# EAGLE board schematic (EAGLE 8.6.3)
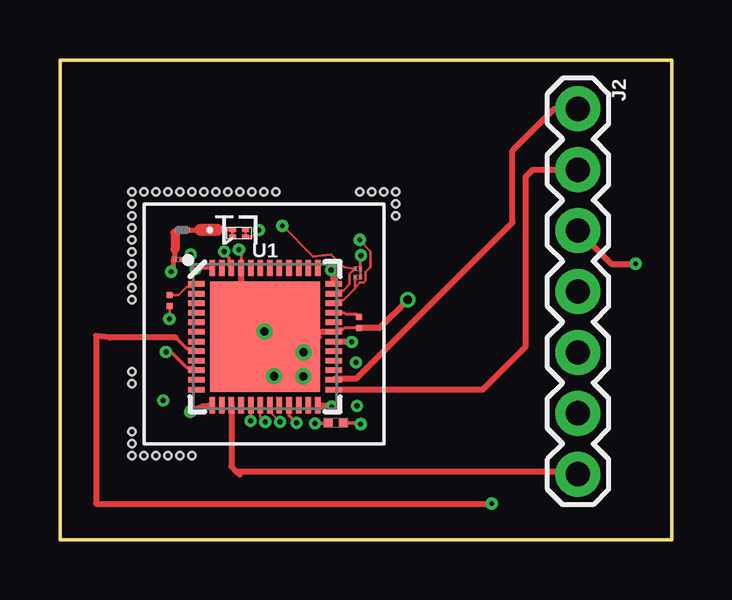
[diagram p0: board, top side]
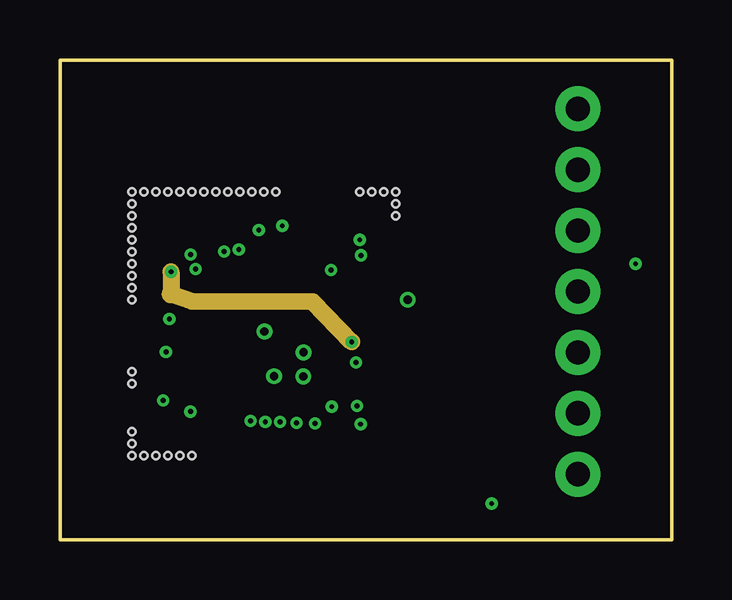
[diagram p1: board, inner layer Route4]
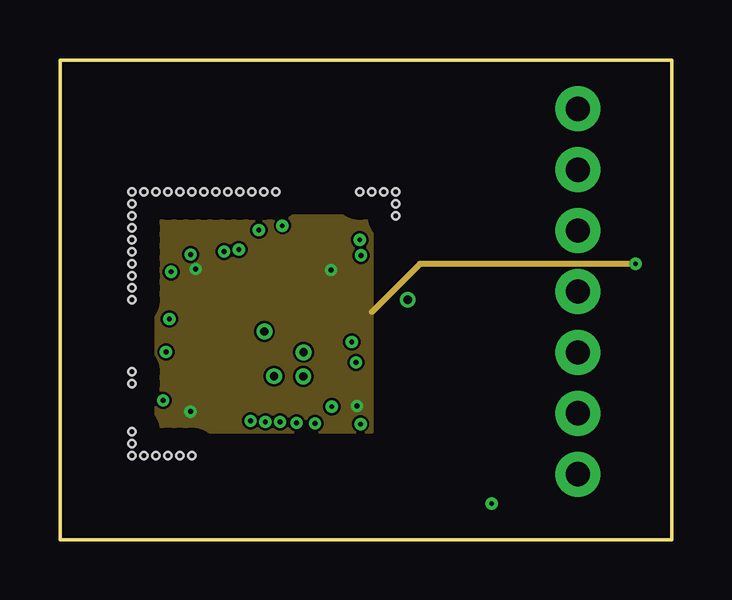
[diagram p2: board, inner layer Route8]
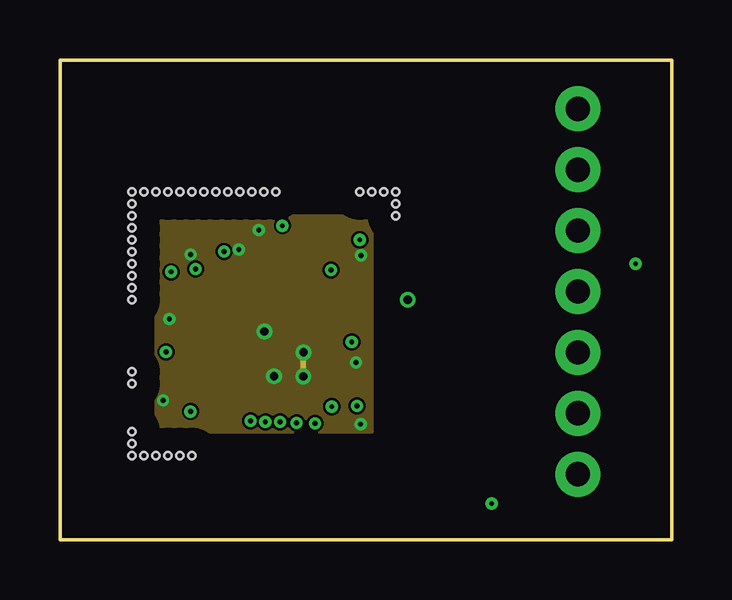
[diagram p3: board, inner layer Route10]
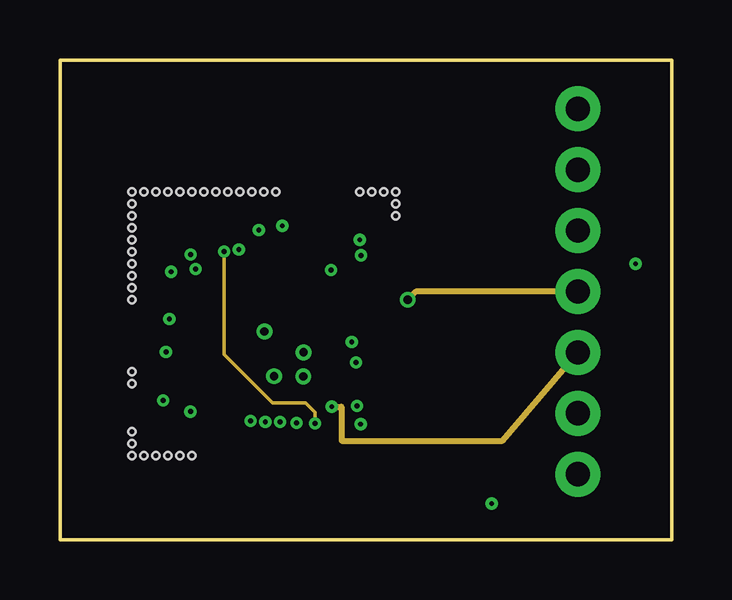
[diagram p4: board, inner layer Route12]
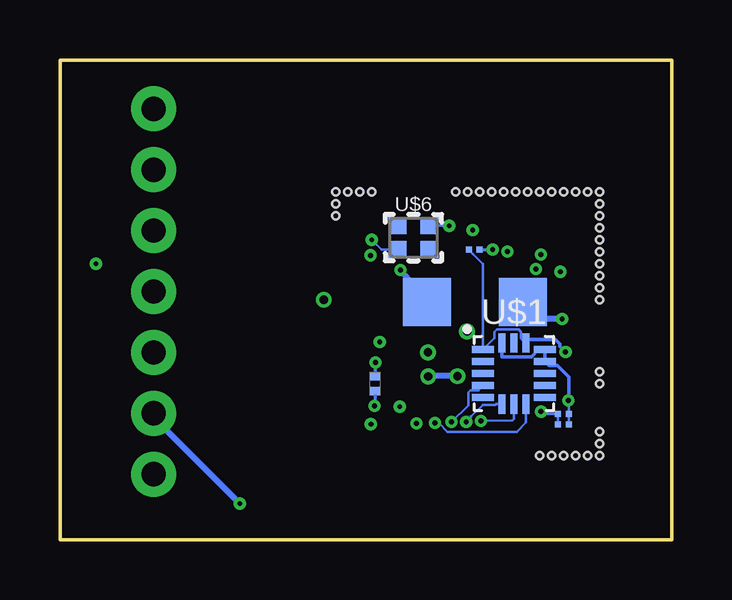
[diagram p5: board, bottom side, seen from below]

Size 25.5 x 20 mm. Coordinates in mm from the lower left corner, seen from the top.
Outline: 0,0 0,20 25.5,20 25.5,0 0,0
Copper layers (((1*4)*8*10)*(12*16)): Top 0.035mm / dielectric 0.25mm / Route4 0.035mm / dielectric 0.31mm / Route8 0.035mm / dielectric 0.25mm / Route10 0.035mm / dielectric 0.31mm / Route12 0.035mm / dielectric 0.25mm / Bottom 0.035mm
Design rules "default *": minimum track width 4mil, minimum drill 8mil, track to track 4mil, track to pad 4mil, pad to pad 4mil, via to via 4mil, smd to smd 2mil, copper to edge 40mil, drill to drill 6mil, minimum pad ring 10mil, minimum via ring 6mil, stop-mask expansion 4mil, vias tented up to drill 0mil, thermal gap 10mil
Holes 0.3 mm at 3,14 3,13.5 3,13 3,12.5 3,12 3,11.5 3,11 3,10.5 3,10 3,7 3,6.5 3,4.5 3,4 3,3.5 3.5,3.5 4,3.5 4.5,3.5 5,3.5 5.5,3.5 3,14.5 3.5,14.5 4,14.5 4.5,14.5 5,14.5 5.5,14.5 6,14.5 6.5,14.5 7,14.5 7.5,14.5 8,14.5 8.5,14.5 9,14.5 12.5,14.5 13,14.5 13.5,14.5 14,14.5 14,14 14,13.5

## Footprints (pad centres in the part's own frame; a part is rotated, then mirrored left to right if it is on the bottom)
CAP_0402-L = smd 0.25 x 0.25: 1 -0.229,0; 2 0.229,0
1X07 = drill 1.016 pad 1.88: 1 0,0; 2 2.54,0; 3 5.08,0; 4 7.62,0; 5 10.16,0; 6 12.7,0; 7 15.24,0
IND_0402-L = smd 0.212 x 0.2: 1 -0.196,0; 2 0.196,0
QFN48-6X6MM = smd 0.68 x 0.23: 1 -2.86,2.2; 2 -2.86,1.8; 3 -2.86,1.4; 4 -2.86,1; 5 -2.86,0.6; 6 -2.86,0.2; 7 -2.86,-0.2; 8 -2.86,-0.6; 9 -2.86,-1; 10 -2.86,-1.4; 11 -2.86,-1.8; 12 -2.86,-2.2; 25 2.86,-2.2; 26 2.86,-1.8; 27 2.86,-1.4; 28 2.86,-1; 29 2.86,-0.6; 30 2.86,-0.2; 31 2.86,0.2; 32 2.86,0.6; 33 2.86,1; 34 2.86,1.4; 35 2.86,1.8; 36 2.86,2.2 | smd 0.23 x 0.68: 13 -2.2,-2.86; 14 -1.8,-2.86; 15 -1.4,-2.86; 16 -1,-2.86; 17 -0.6,-2.86; 18 -0.2,-2.86; 19 0.2,-2.86; 20 0.6,-2.86; 21 1,-2.86; 22 1.4,-2.86; 23 1.8,-2.86; 24 2.2,-2.86; 37 2.2,2.86; 38 1.8,2.86; 39 1.4,2.86; 40 1,2.86; 41 0.6,2.86; 42 0.2,2.86; 43 -0.2,2.86; 44 -0.6,2.86; 45 -1,2.86; 46 -1.4,2.86; 47 -1.8,2.86; 48 -2.2,2.86 | smd 4.6 x 4.6: EP 0,0
TFLGA-16/3.3MMX3.1MM = smd 0.3 x 0.8: CS 0.5,-1.275; GND@3 -0.5,1.275; MISO 0,-1.275; MOSI -0.5,-1.275; NC@2 0,1.275; VS 0.5,1.275 | smd 0.925 x 0.3: GND@1 1.288,0.5; GND@2 1.288,1; INT1 1.288,0; INT2 1.288,-1; NC@1 -1.288,0.5; RESERVED@1 -1.288,0; RESERVED@2 -1.288,-1; RESERVED@3 1.288,-0.5; SCLK -1.288,-0.5; VDD/IO -1.288,1
4P7UFCAPACITOR = smd 0.35 x 0.4: P$3 0.18,0.15; P$4 0.8,0.15
0P8PFCAPACITOR = smd 0.125 x 0.15: P$1 0.034,0.075; P$2 0.27,0.075
ANTENNA_FOOTPRINT = smd 0.3 x 0.2: FEED@1 0.77,0.1; FEED@2 0.77,0.4; GND@1 0.23,0.1; GND@2 0.23,0.4
32MHZCRYSTAL = smd 0.75 x 0.7: 1 0.485,0.47; 2 1.835,0.47; 3 1.835,1.47; 4 0.485,1.47
1UFCAPACITOR = smd 0.35 x 0.4: P$3 0.18,0.15; P$4 0.8,0.15
6PFCAPACITOR = smd 0.125 x 0.15: P$1 0.034,0.075; P$2 0.27,0.075
POWER = smd 2 x 2: GND 5,1; VDD 1,1

## Placement (x,y rotation side)
C1  C0402X5R0G104M020BCCAP_0402-L  [CAP_0402-L]  8.23,12.1 180 bottom
C2  C0402X5R0G104M020BCCAP_0402-L  [CAP_0402-L]  4.57,9.97 270 top
C3  C0402X5R0G104M020BCCAP_0402-L  [CAP_0402-L]  4.52,4.8 180 bottom
C4  C0402X5R0G104M020BCCAP_0402-L  [CAP_0402-L]  4.51,5.24 180 bottom
C5  C0402C0G1C101J020BCCAP_0402-L  [CAP_0402-L]  12.48,9.05 270 top
J2  header  [1X07]  21.6,17.96 270 top
L1  MLG0402Q3N9ST000IND_0402-L  [IND_0402-L]  5.11,12.91 180 top
U1  NRF52832  [QFN48-6X6MM]  8.55,8.46 0 top
U$1  ADXL362  [TFLGA-16/3.3MMX3.1MM]  6.57,6.92 0 bottom
U$2  4P7UFCAPACITOR  [4P7UFCAPACITOR]  12.21,6.01 90 bottom
U$4  0P8PFCAPACITOR  [0P8PFCAPACITOR]  5.09,11.75 180 top
U$5  ANTENNA  [ANTENNA_FOOTPRINT]  7.96,13.03 180 top
U$6  32MHZCRYSTAL  [32MHZCRYSTAL]  11.92,11.62 0 bottom
U$7  1UFCAPACITOR  [1UFCAPACITOR]  12,5.02 180 top
U$8  6PFCAPACITOR  [6PFCAPACITOR]  12.56,11.02 180 top
U$9  6PFCAPACITOR  [6PFCAPACITOR]  12.57,11.37 180 top
U$10  POWER  [POWER]  11.2,8.91 0 bottom

## Library data of the parts
C1-C4 = 0p1_uF_capacitor; MANUFACTURER_PART_NUMBER: C0402C0G1C101J020BC; VENDOR: TDK
C5 = 100_pF_capacitor; MANUFACTURER_PART_NUMBER: C0402C0G1C101J020BC; VENDOR: TDK
J2 = SparkFun-Connectors
L1 = 3p9_nH_inductor; MANUFACTURER_PART_NUMBER: MLG0402Q3N9ST000; VENDOR: TDK
U1 = nrf52832-breakout-temp; PROD_ID: IC-13460
U$1 = ADXL362
U$2 = 4p7_uF_capacitor
U$4 = 0p8_pF_capacitor
U$5 = 2p4_ghz_antenna
U$6 = 32_mhz_crystal
U$7 = 1_uF_capacitor
U$8 U$9 = 6_pF_capacitor
U$10 = power

## Nets
ADXL_POWER-QFAA: C1.2 U1.10 U$1.VDD/IO U$1.VS
ANT-QFAA: L1.2 U1.30 U$4.P$2
CS-QFAA: U1.21 U$1.CS
DEC1-QFAA: C2.1 U1.1
DEC3-QFAA: C5.1 U1.33
DEC4-QFAA: U1.46 U$7.P$4
GND: C1.1 C2.2 C3.1 C4.1 C5.2 J2.4 U1.31 U1.45 U1.EP U$1.GND@1 U$1.GND@2 U$1.GND@3 U$2.P$4 U$4.P$1 U$5.GND@1 U$5.GND@2 U$7.P$3 U$8.P$1 U$9.P$1 U$10.GND
MISO-QFAA: U1.17 U$1.MISO
MOSI-QFAA: U1.18 U$1.MOSI
N$1: L1.1 U$5.FEED@1 U$5.FEED@2
P0.06-QFAA: J2.6 U1.8
P0.12-QFAA: J2.7 U1.15
RESET-QFAA: J2.5 U1.24
SCLK-QFAA: U1.19 U$1.SCLK
SWDCLK-QFAA: J2.2 U1.25
SWDIO-QFAA: J2.1 U1.26
VDD: C3.2 C4.2 J2.3 U1.13 U1.36 U1.48 U$2.P$3 U$10.VDD
XC1-QFAA: U1.34 U$6.1 U$8.P$2
XC2-QFAA: U1.35 U$6.3 U$9.P$2

## Tracks (layer width: path | path; a pad name or v marks a point on that pad's centre or on a via)
ADXL_POWER-QFAA  (via drill 0.2)
  Top 0.152: U1.10 5.58,7.17 5.28,7.17 4.63,7.82 v4.42,7.82
  Bottom 0.102: U$1.VS 6.22,8.34 6.27,8.4 6.27,8.66 6.36,8.75 7.29,8.75 7.38,8.66 7.38,8.41 U$1.VDD/IO 7.86,11.49 8.28,11.91 8.28,11.92 C1.2
  Bottom 0.152: v4.42,7.82 4.65,8.04 4.65,8.15 4.84,8.34 6.22,8.34
ANT-QFAA  (via drill 0.2)
  Top 0.127: U$4.P$2 4.72,11.64
  Top 0.203: 4.8,12.3 4.8,12.1 4.8,11.84 4.79,11.84 4.72,11.64 4.72,11.26 v4.63,11.16
  Top 0.254: v12.17,8.24 11.43,8.24 11.42,8.25 | 11.42,8.25 11.41,8.25 | U1.30 11.42,8.25 | L1.2 4.8,12.79
  Top 0.381: 4.8,12.79 4.8,12.1
  Route4 0.711: v12.17,8.24 10.54,9.92 5.49,9.95 4.6,10.27 4.6,10.2 4.63,10.23 v4.63,11.16
CS-QFAA  (via drill 0.2)
  Top 0.152: U1.21 9.55,5.17 v9.87,4.86
  Bottom 0.102: v9.87,4.86 9.71,4.86 9.34,4.5 6.46,4.5 6.07,4.88 6.07,4.89 U$1.CS
DEC1-QFAA
  Top 0.102: U1.1 5.56,10.53 5.29,10.53 4.96,10.2 C2.1
DEC3-QFAA
  Top 0.127: U1.33 11.86,9.46 11.91,9.41 12.35,9.41 C5.1
DEC4-QFAA  (via drill 0.2)
  Top 0.152: U1.46 7.04,11.43 7.04,11.73 6.85,11.93 v6.85,12.02 | v10.63,4.84 11.17,4.84 U$7.P$4
  Route12 0.152: v6.85,12.02 6.85,7.72 8.87,5.7 10.24,5.7 10.63,5.31 v10.63,4.84
GND  (via drill 0.2, 0.35)
  Top 0.102: U$4.P$1 5.25,11.68 v5.45,11.89 | U$5.GND@1 U$5.GND@2 8.02,12.63 v8.29,12.9 | U$9.P$1 U$8.P$1 | C2.2 v4.57,9.2 v4.56,9.19
  Top 0.127: v7.46,12.1 7.55,12 U1.45 | U$9.P$1 12.53,11.84 v12.55,11.85 | C5.2 11.86,8.82 11.82,8.78 11.53,8.78 U1.31
  Top 0.152: 10.45,8.46 U1.EP | U$7.P$3 12.48,4.87 v12.54,4.81
  Top 0.203: U1.45 7.55,10.9 | v8.53,8.68 U1.EP
  Top 0.254: v14.5,10 13.32,8.82 C5.2 | U1.31 10.78,8.66 | 10.78,8.66 10.65,8.66 10.45,8.46 | 7.55,10.9 7.55,9.46 v8.53,8.68 | U1.EP 8.93,8.08 v8.93,6.82 | v10.15,7.81 10.78,8.43 10.78,8.66
  Route10 0.102: v5.45,11.89 5.45,11.85
  Route10 0.254: 10.13,6.73 10.13,6.78 v10.15,6.8 v10.15,7.8 v10.15,7.81
  Route12 0.254: J2.4 14.84,10.34 v14.5,10
  Bottom 0.102: C3.1 C4.1 4.28,5.78 v4.3,5.8
  Bottom 0.127: C1.1 v7.46,12.1 | U$2.P$4 12.35,6.83 v12.35,7.39
  Bottom 0.152: 4.59,9.22 v4.56,9.19 | 4.28,5.78 4.28,6.79 4.75,7.25 5.11,7.25 U$1.GND@1 U$1.GND@2 5.55,7.92 5.85,7.62 6.8,7.62 7.08,7.62 7.07,7.63 U$1.GND@3
  Bottom 0.254: U$10.GND 5.51,9.22 4.59,9.22 | v8.93,6.82 10.14,6.82 v10.15,6.8
  pour Route10: 4,4.5 13,4.5 13,13.5 4,13.5
MISO-QFAA  (via drill 0.2 pad 0.51)
  Top 0.102: U1.17 7.95,4.96 v7.95,4.95
  Bottom 0.102: v7.95,4.95 6.64,4.96 6.57,5.02 U$1.MISO
MOSI-QFAA  (via drill 0.2 pad 0.51)
  Top 0.102: U1.18 8.35,5.14 8.36,5.13 8.36,5.11 v8.56,4.9
  Bottom 0.102: v8.56,4.9 8.36,5.11 8.36,5.13 7.87,5.62 7.34,5.62 7.31,5.65 U$1.MOSI
N$1
  Top 0.152: 6.37,12.93 6.56,12.93 U$5.FEED@1 U$5.FEED@2
  Top 0.203: L1.1 5.85,12.91
  Top 0.254: 7.19,12.64 U$5.FEED@2
  Top 0.508: 5.85,12.91 5.87,12.93 6.56,12.93
P0.06-QFAA  (via drill 0.2)
  Top 0.152: U1.8 5.58,7.97 5.28,7.97 5.17,8.07 5.17,8.08 4.83,8.43
  Top 0.254: 4.83,8.43 2.07,8.43 1.5,8.5 1.5,1.5 v18,1.5
  Bottom 0.254: v18,1.5 21.6,5.1 J2.6
P0.12-QFAA
  Top 0.254: U1.15 7.15,3.05 7.35,2.85 | 7.35,2.85 7.5,2.7 | 7.35,2.85 21.47,2.85 J2.7
RESET-QFAA  (via drill 0.2)
  Top 0.254: U1.24 11.28,5.6 v11.33,5.54
  Route12 0.254: v11.33,5.54 11.74,5.54 11.74,4.12 18.45,4.12 J2.5
SCLK-QFAA  (via drill 0.2 pad 0.51)
  Top 0.102: U1.19 8.75,5.33 v9.17,4.9
  Bottom 0.102: v9.17,4.9 8.48,5.6 8.48,6.14 8.39,6.23 8.06,6.23 U$1.SCLK
SWDCLK-QFAA
  Top 0.254: U1.25 17.63,6.26 19.42,8.05 19.42,15.13 19.72,15.42 J2.2
SWDIO-QFAA
  Top 0.254: U1.26 11.47,6.72 12.36,6.72 18.87,13.22 18.87,16.23 20.61,17.96 J2.1
VDD  (via drill 0.2, 0.2 pad 0.51)
  Top 0.152: U1.48 5.72,11.32 v5.65,11.28
  Top 0.254: U1.13 6,5.56 v5.44,5.34 | J2.3 22.98,11.5 v24,11.5 | U1.36 11.41,11.11 v11.3,11.23
  Route8 0.254: v24,11.5 15,11.5 13,9.5
  Bottom 0.102: v5.44,5.34 5.35,5.24 C4.2 C3.2
  Bottom 0.127: U$2.P$3 12.36,5.6 v12.38,5.58
  Bottom 0.254: U$10.VDD 10.2,10.02 v11.3,11.23
  pour Route8: 4,4.5 13,4.5 13,13.5 4,13.5
XC1-QFAA  (via drill 0.2)
  Top 0.102: 11.44,9.83 U1.34 11.54,9.99 11.81,9.99 12.29,10.47 12.29,10.5 | 12.29,10.5 U$8.P$2 | 12.29,10.5 12.51,10.72 12.66,10.72 12.75,10.81 12.75,11.15 12.95,11.36 12.95,12.02 12.5,12.47 v12.5,12.5
  Bottom 0.102: v12.5,12.5 12.09,12.09 U$6.1
XC2-QFAA  (via drill 0.2)
  Top 0.102: U1.35 11.54,10.39 11.81,10.39 12.08,10.66 12.08,11.08 12.17,11.17 12.18,11.17 U$9.P$2 11.83,11.37 11.31,11.89 10.55,11.81 v9.27,13.09
  Bottom 0.102: v9.27,13.09 v9.28,13.09 U$6.3